# Altium PCB Converter_Module_PT100_V2l1.PcbDoc
Units mm, origin at the board's own origin, x right, y up, seen from the top; angles counter-clockwise.
Board outline 41 x 41 mm, 4 copper layers (L1, L2(GND), L3(PWR), L4), stack 0.778 mm thick; 53 components, 34 nets, 166 pads, 0 vias.
Unrouted connection lines stored in the file: 11.
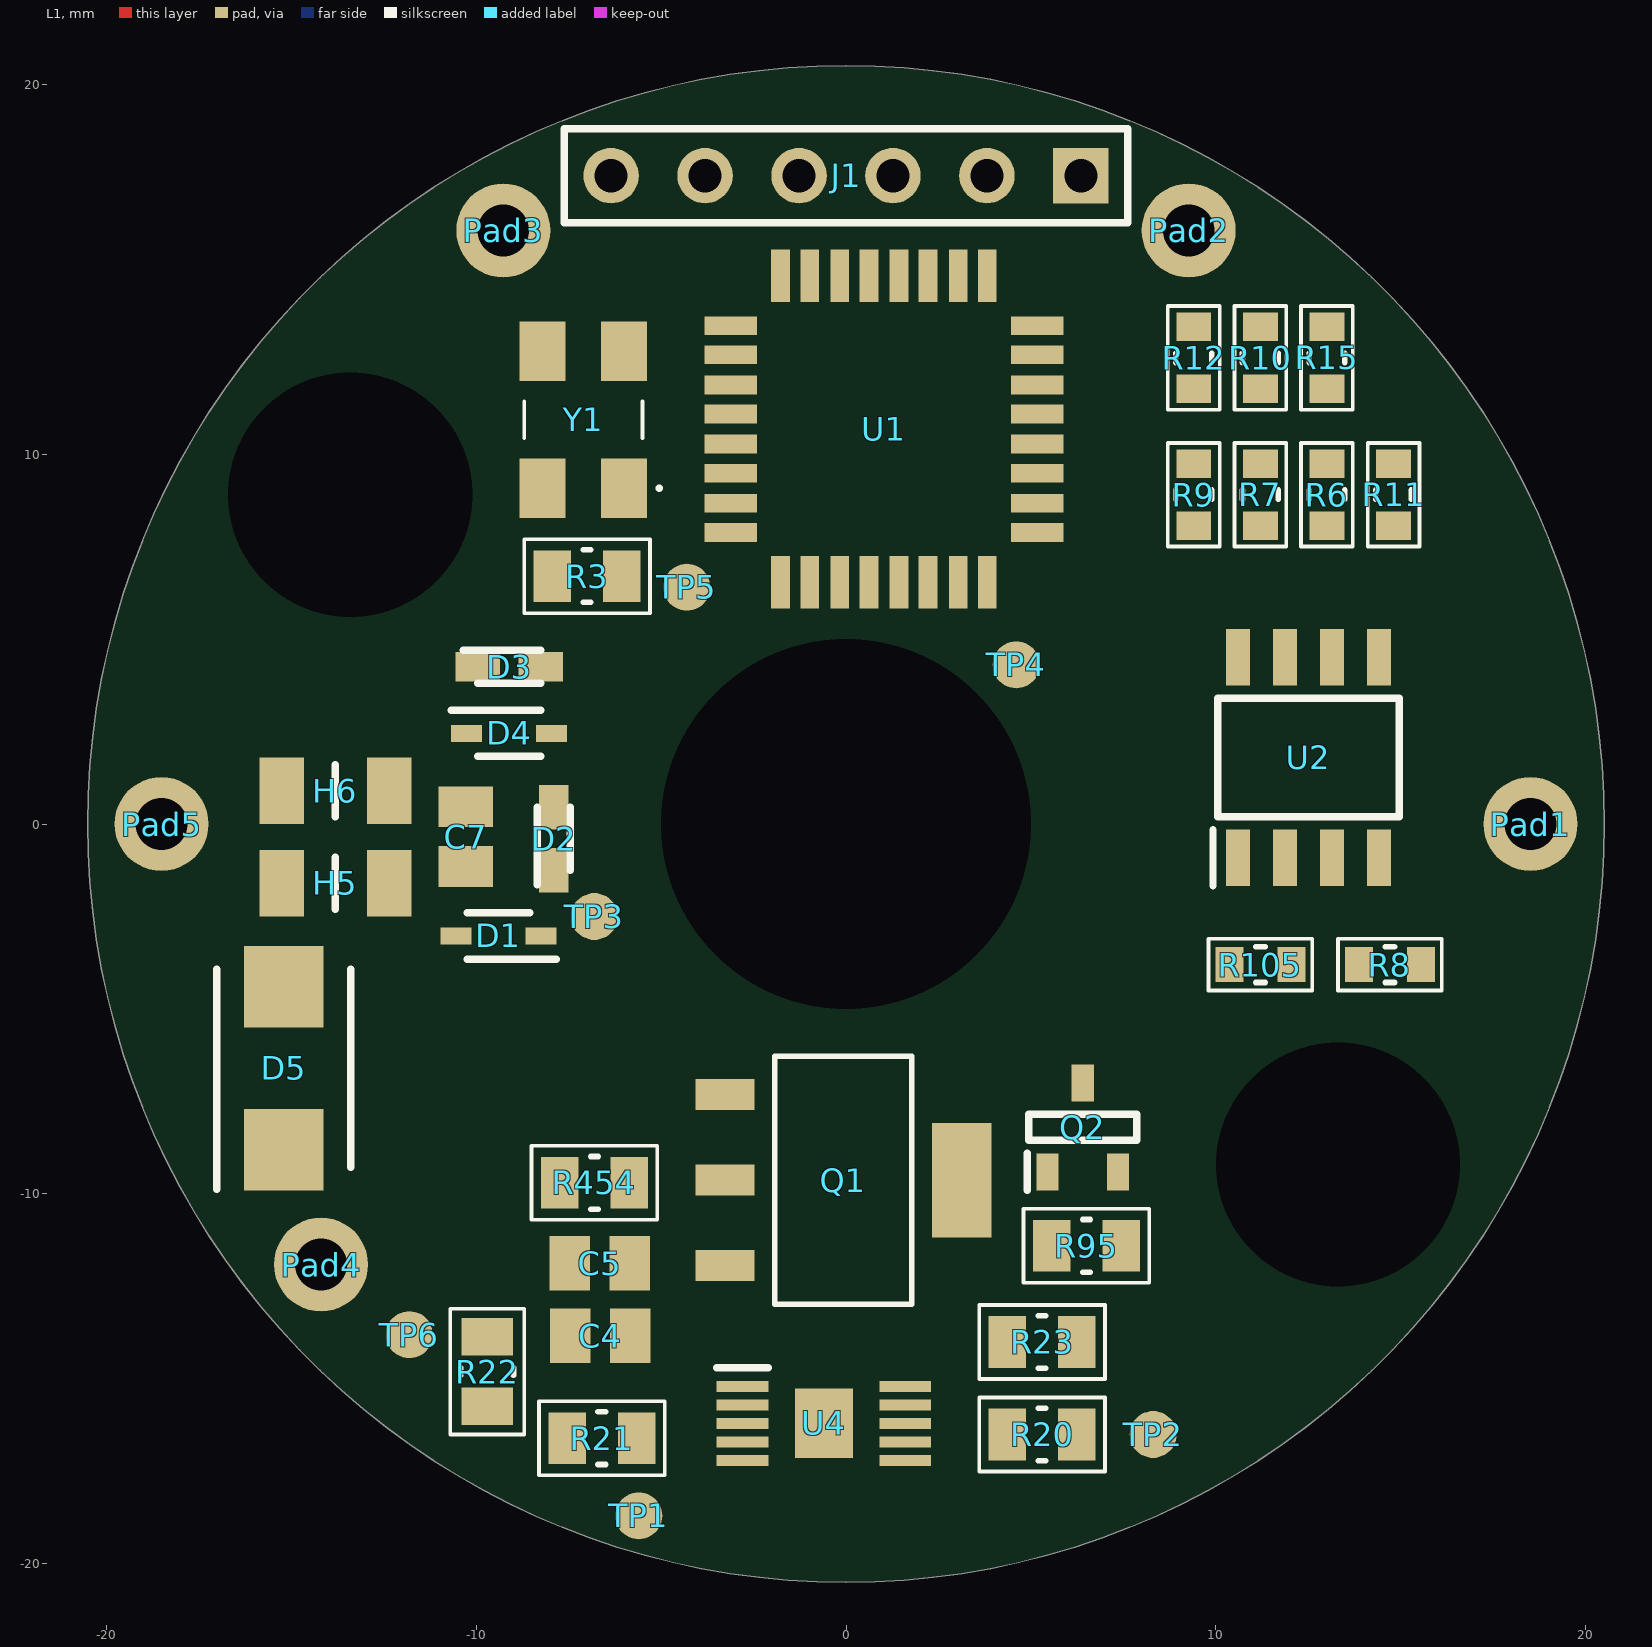
[diagram p0: L1 view]
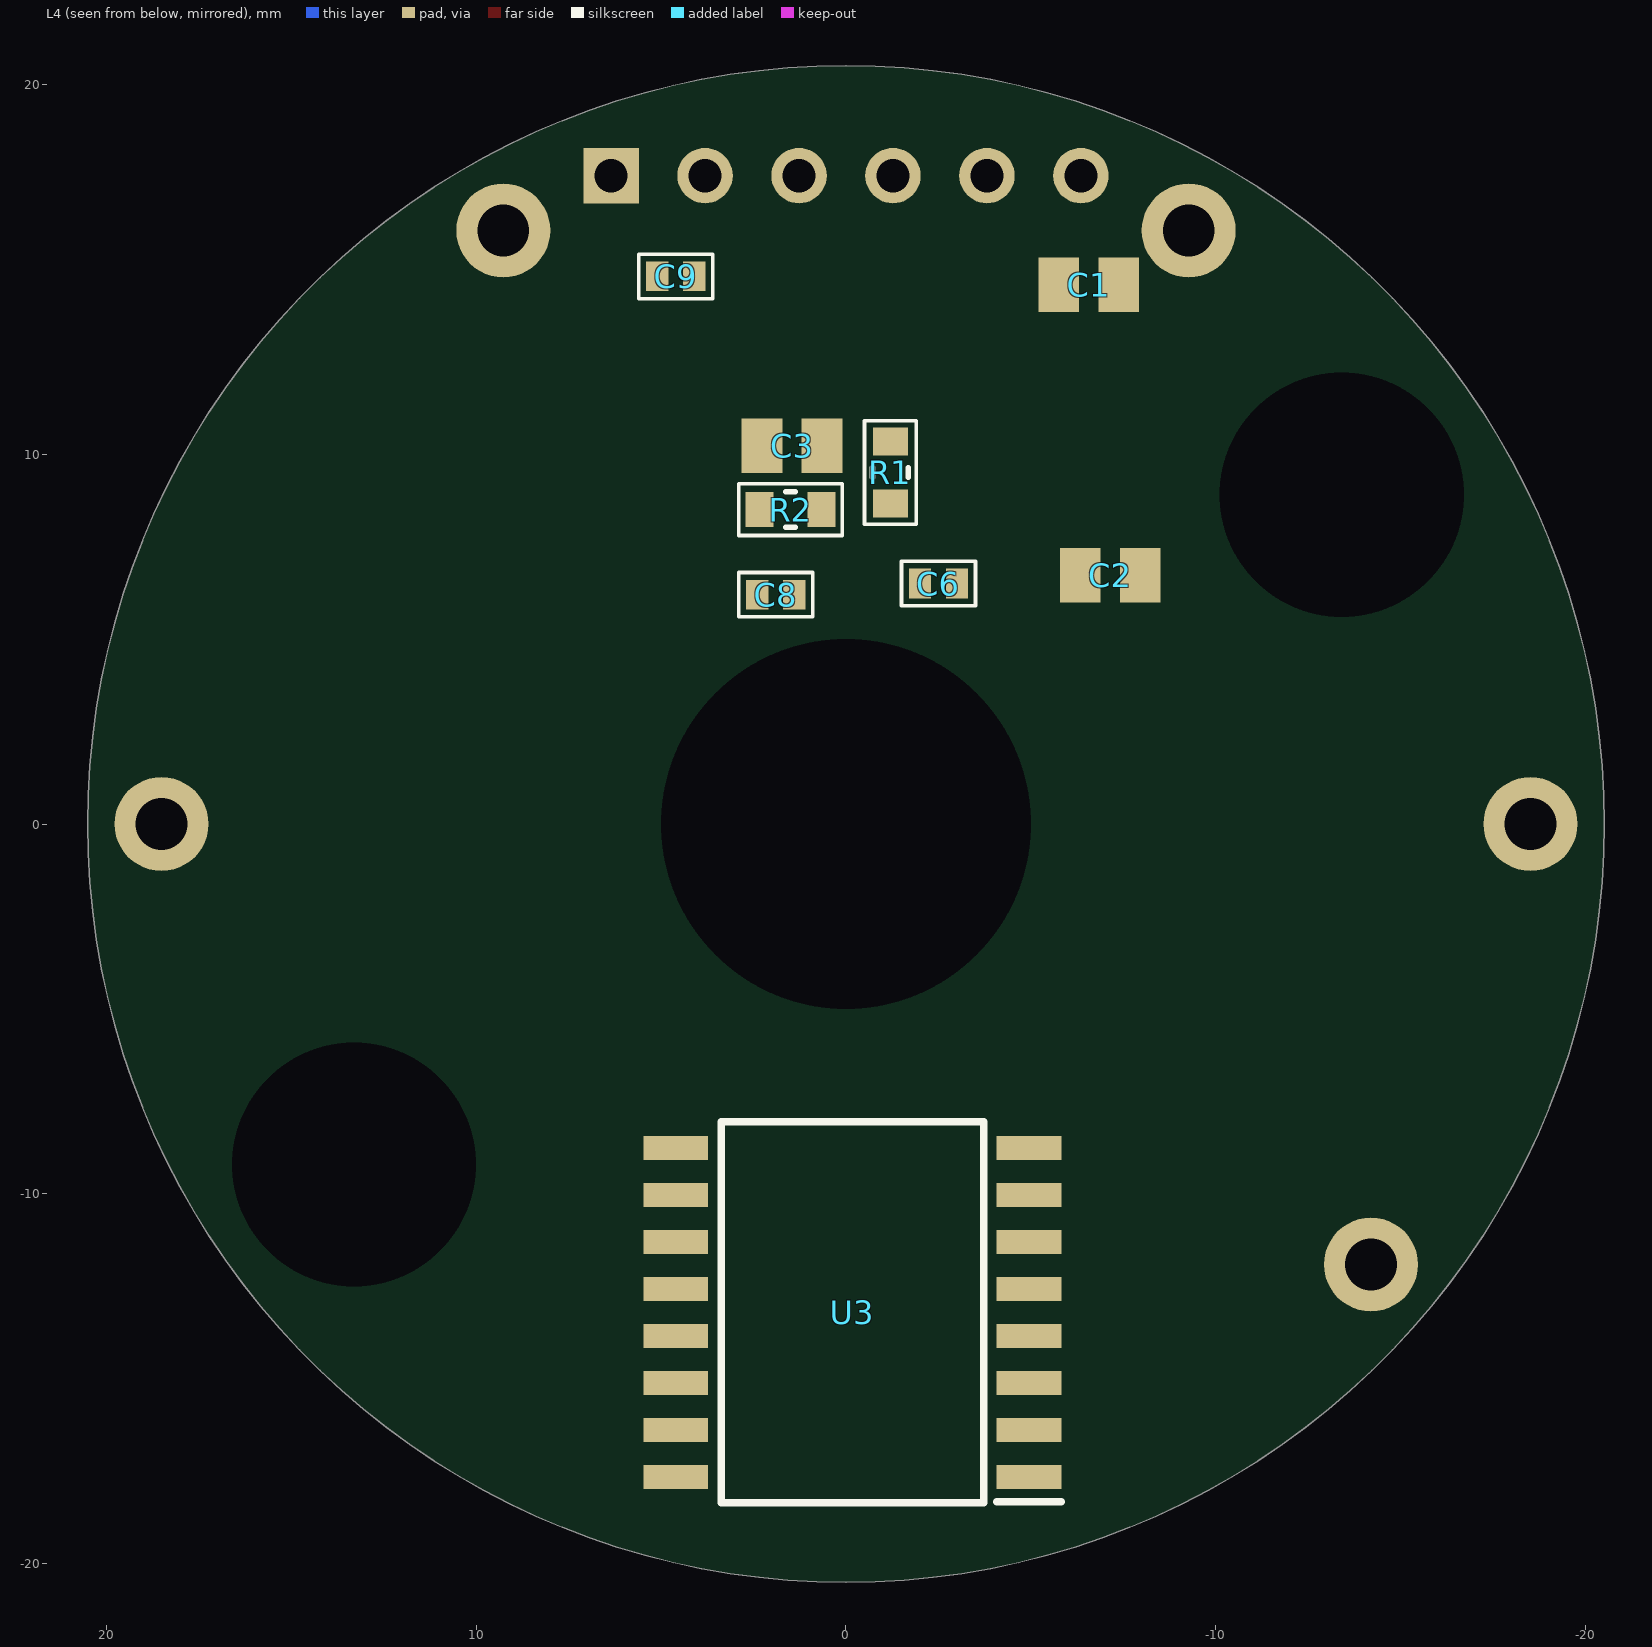
[diagram p1: L4 view, seen from below]
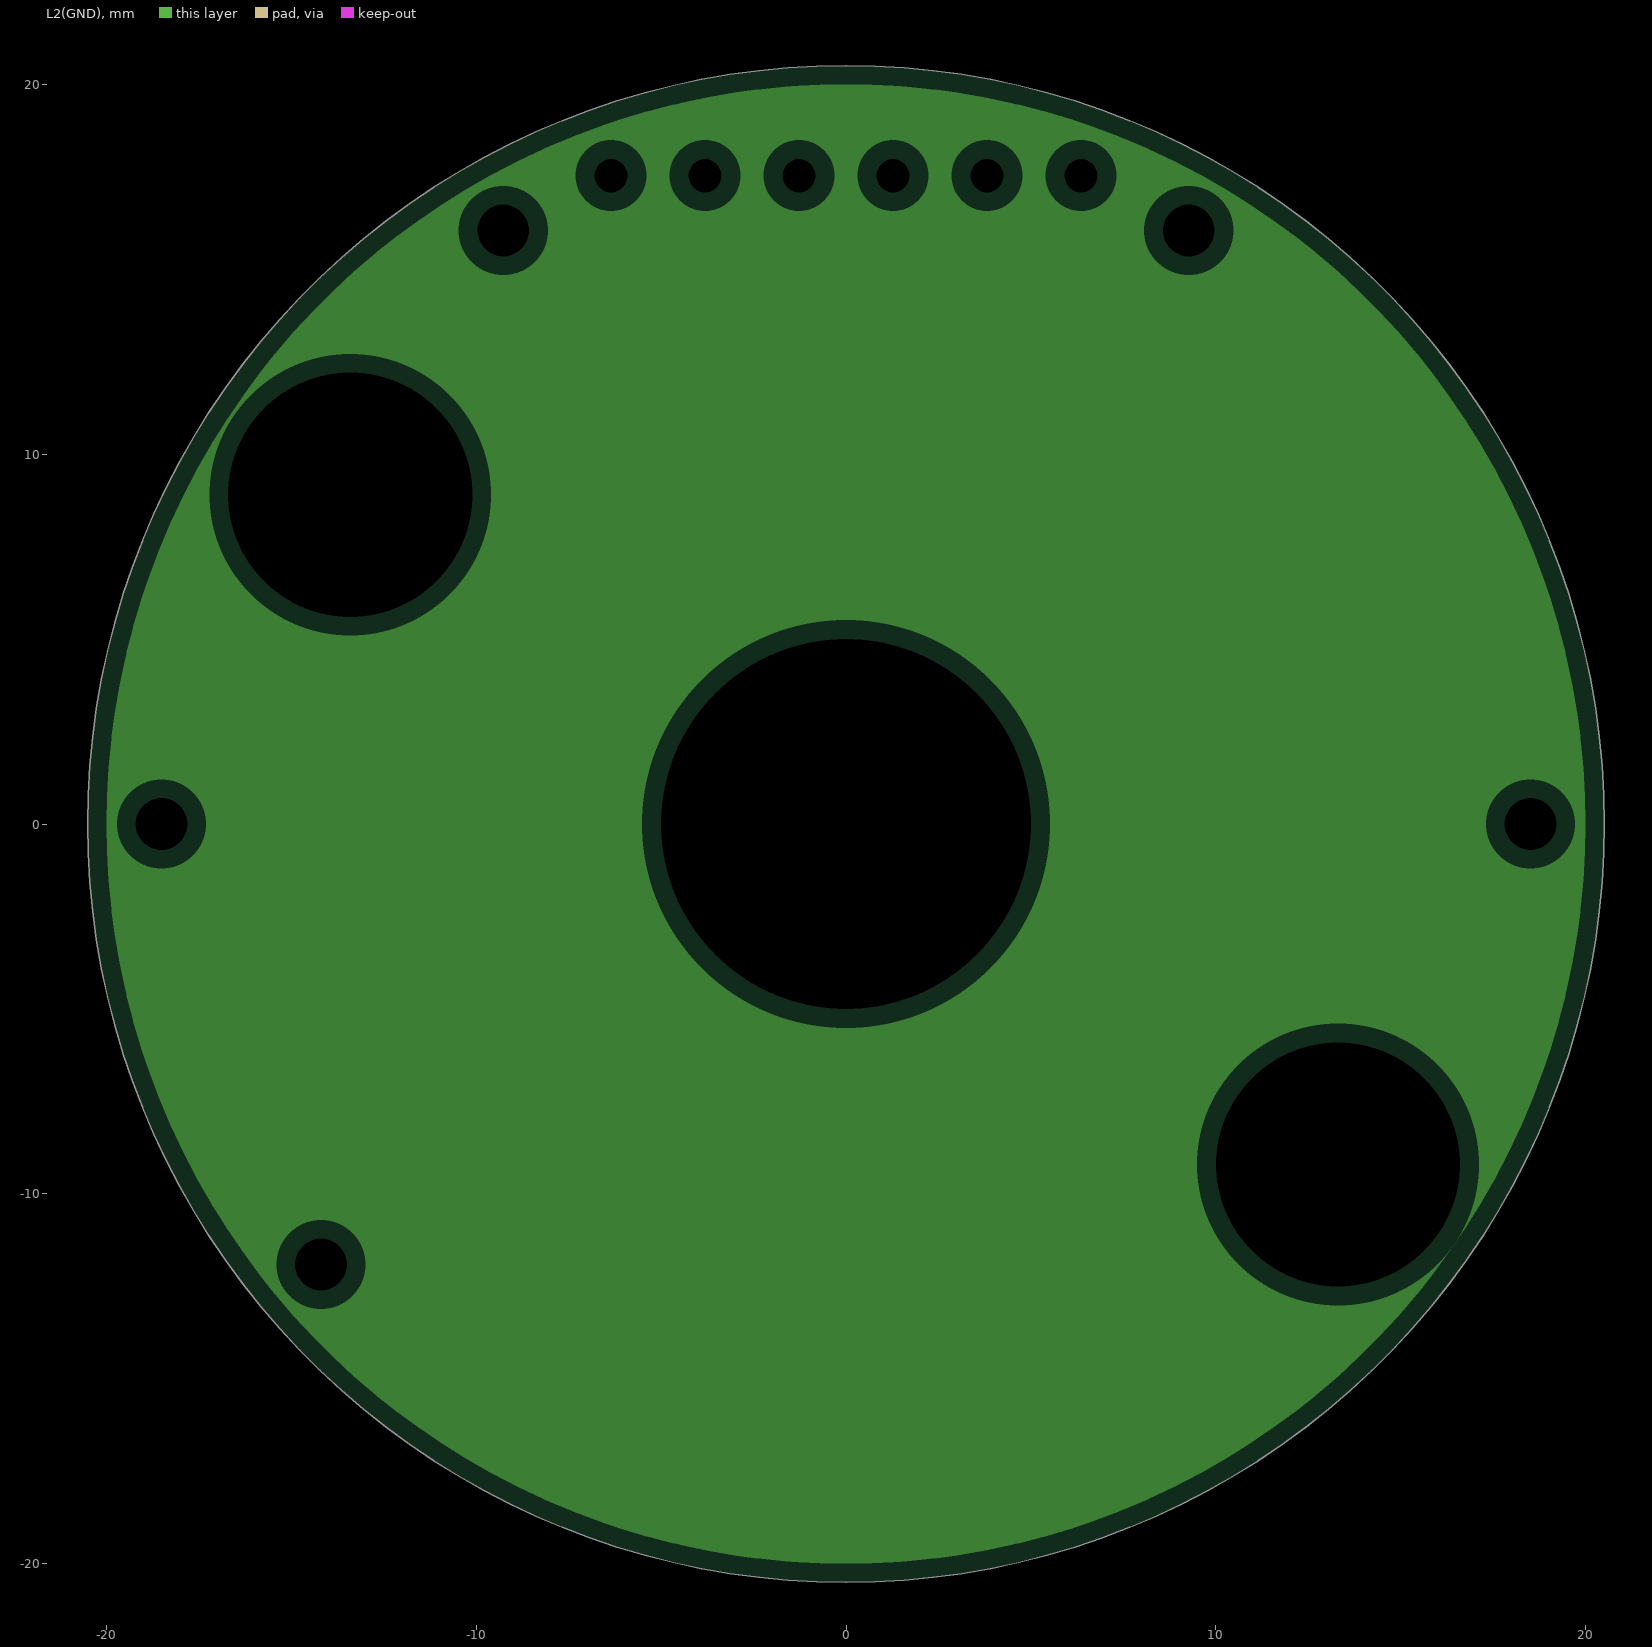
[diagram p2: L2(GND), clearances drawn from the general rule]
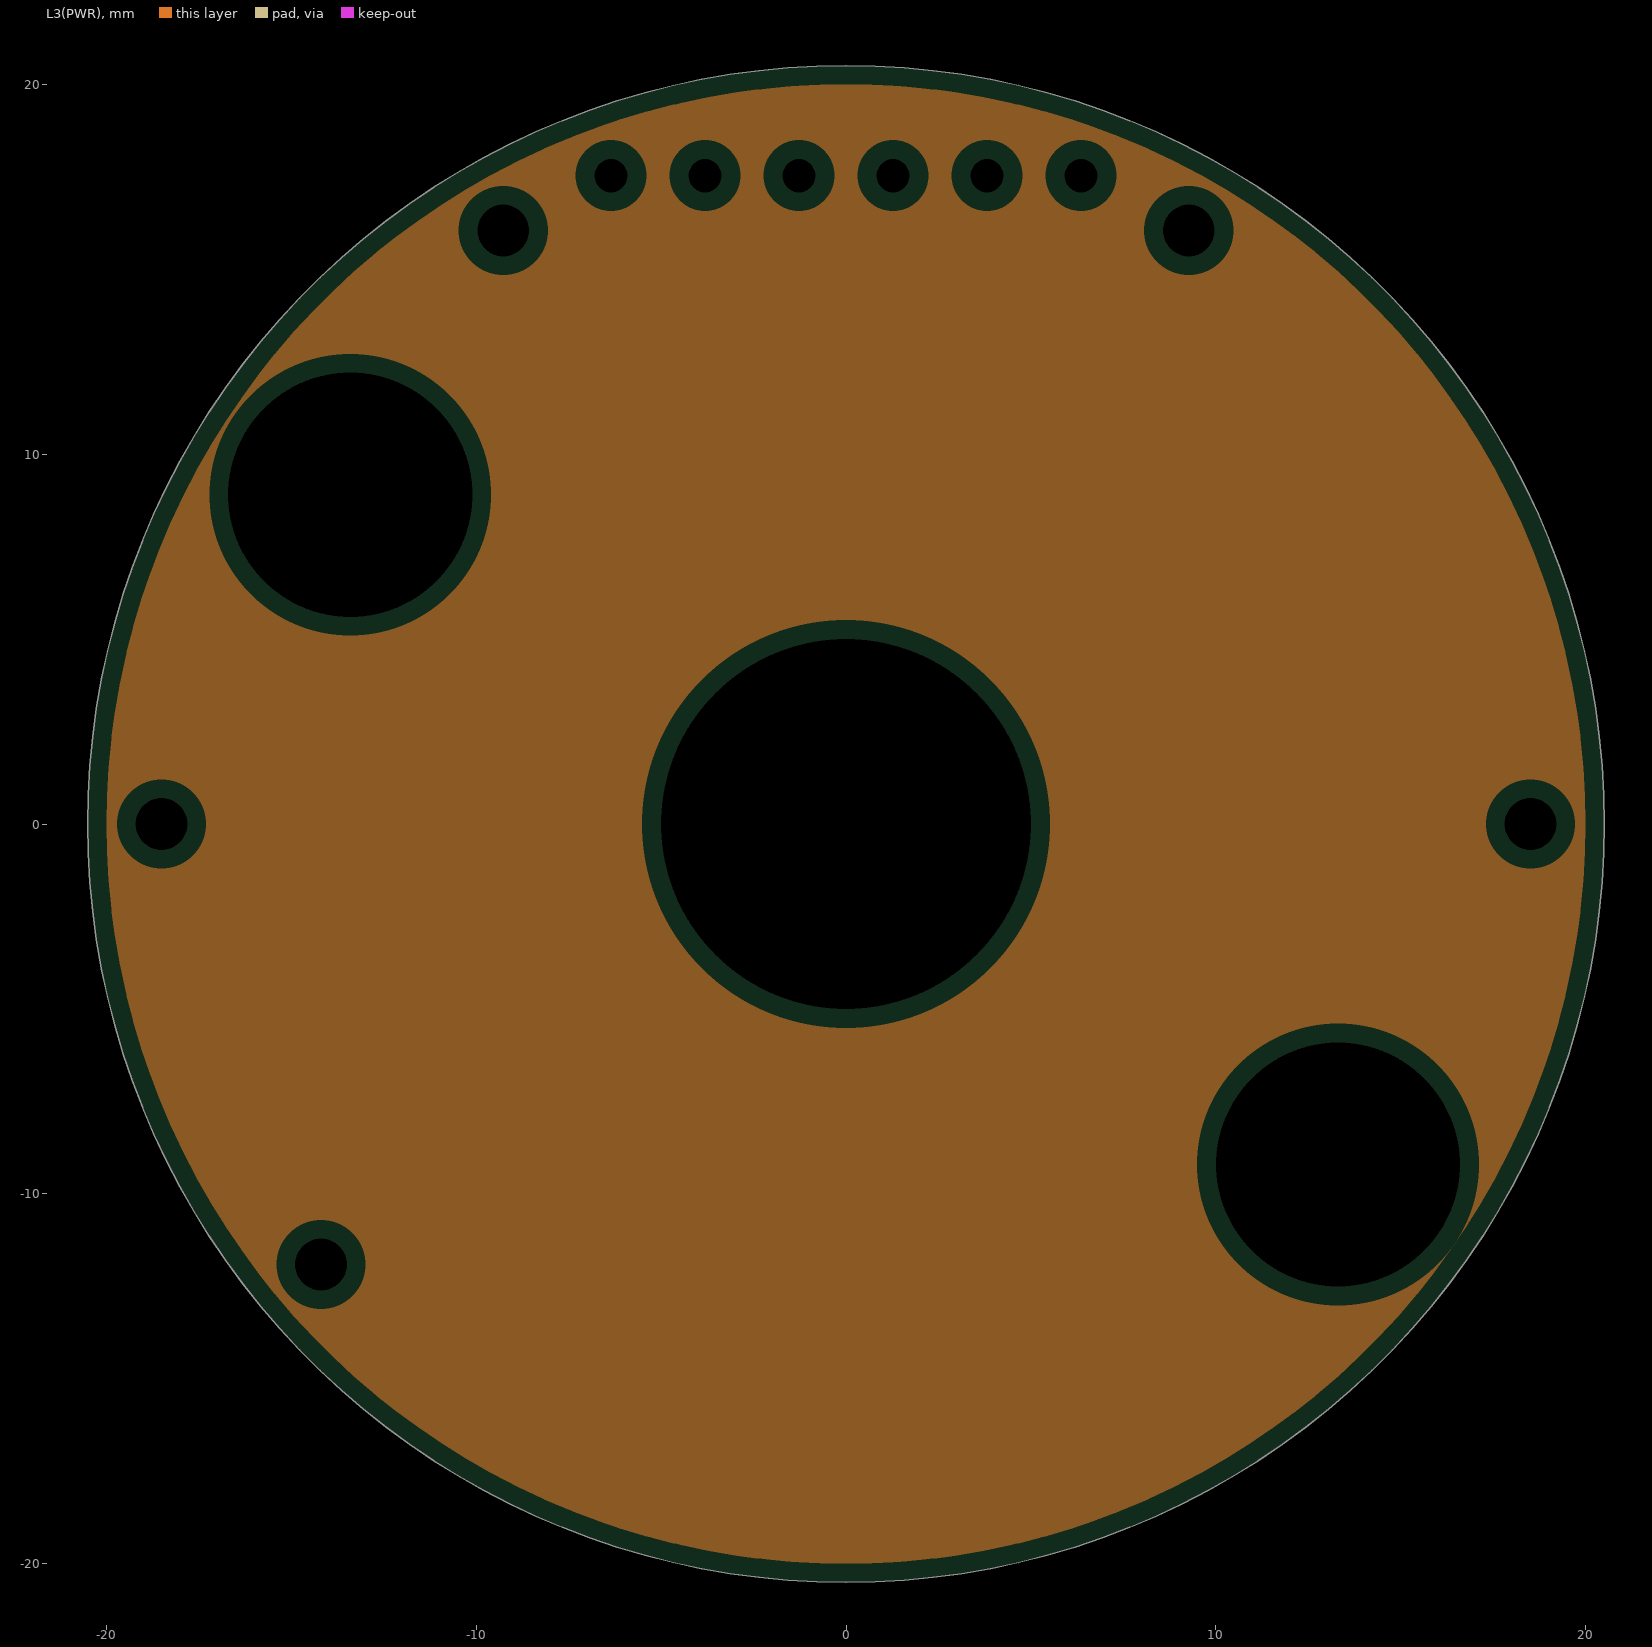
[diagram p3: L3(PWR), clearances drawn from the general rule]

## Layer stack, top to bottom
Top Solder: solder mask 0.0102, Solder Resist, Dk 3.5
L1: signal copper 0.0356
Dielectric 1: core 0.254, FR-4, Dk 4.2
L2(GND): plane copper 0.036
Dielectric 3: prepreg 0.127, Dk 4.2
L3(PWR): plane copper 0.036
Dielectric 2: core 0.254, Dk 4.2
L4: signal copper 0.0356
Bottom Solder: solder mask 0.0102, Solder Resist, Dk 3.5

## Board outline
-20.5,0 ccw(c0,0) 0,-20.5 ccw(c0,0) 20.5,0 ccw(c0,0) 0,20.5 ccw(c0,0)

## Design rules (kind name [scope] priority, off if disabled: settings)
Clearance [All] p1: gap=0.15
PlaneClearance [All] p1: clearance=0.508
PlaneConnect [All] p1: planeconnectstyle=Relief reliefexpansion=0.508 reliefentries=4 reliefconductorwidth=0.254 reliefairgap=0.254
PolygonConnect [All] p1: connectstyle=Relief reliefconductorwidth=0.254 reliefentries=4 polygonreliefangle="90 Angle" airgapwidth=0.254
RoomDefinition "[03] - Converter" [InComponentClass('[03] - Converter')] p1: confinementstyle=ConfineIn formatcopy=TRUE lockcomponents=FALSE outline 78.543,-48.476 339.655,-48.476 339.655,-30.188 78.543,-30.188
RoutingVias [All] p1: holewidth=0.2 width=0.45 viastyle="Through Hole" minholewidth=0.09 minwidth=0.24 maxholewidth=4 maxwidth=4
SolderMaskExpansion [All] p1: expansion=0.102
Width [All] p1: maxlimit=8 minlimit=0.15 preferedwidth=0.15
28 further rules are at their usual default settings.

## Components (designator, comment, footprint, x,y, rotation, side; value= is the part's Value field where it differs from the comment)
C1 "18pF" PCBComponent_1 -6.6,14.5 r0 bottom
C2 "18pF" PCBComponent_1 -7.1,6.8 r180 bottom
C3 "0.01uF" PCBComponent_1 1.5,10.3 r180 bottom
C4 "0.1uF" PCBComponent_1 -6.6,-13.9 r180 top
C5 "0.1uF" PCBComponent_1 -6.7,-11.8 r0 top
C6 "10uF" C0603 -2.5,6.5 r0 bottom
C7 "0.01uF(10nF)" PCBComponent_1 -10.2,-0.3 r270 top
C8 "10uF" C0603 1.9,6.2 r180 bottom
C9 "10uF" C0603 4.6,14.8 r180 bottom
D1 "BAT46WJ,115" BAT46WJ,115 -9.325,-3.05 r180 top
D2 "CDSU101A" CDSU101A -7.9,-0.4 r90 top
D3 "CDSU101A" CDSU101A -9.1,4.25 r0 top
D4 "BAT46WJ,115" BAT46WJ,115 -9.175,2.475 r0 top
D5 "SM6T39CA" SM6T39CA -15.2,-6.6 r90 top
H5 "MI1206K601R" MI1206K601R -13.8,-1.6 r180 top
H6 "MI1206K601R" MI1206K601R -13.8,0.9 r180 top
J1 "Header 6" HDR1X6 6.35,17.525 r180 top
Pad1 "S+" 1X1-BIGPOGO 18.5,0 r90 top
Pad2 "RTD+" 1X1-BIGPOGO 9.262,16.042 r90 top
Pad3 "RTD-" 1X1-BIGPOGO -9.262,16.042 r90 top
Pad4 "Loop-" 1X1-BIGPOGO -14.19,-11.907 r90 top
Pad5 "Loop+" 1X1-BIGPOGO -18.5,0 r90 top
Q1 "BSP613PH6327XTSA1" BSP613PH6327XTA1 -0.2,-9.5 r0 top
Q2 "SMMBT2907ALT3G" MMBT2907ALT3G 6.4,-8.2 r90 top
R1 "10k" R0603 -1.2,9.5 r270 bottom
R2 "10k" R0603 1.5,8.5 r180 bottom
R3 "1M" R0805 -7,6.7 r0 top
R6 "10k" R0603 13,8.9 r270 top
R7 "1k" R0603 11.2,8.9 r90 top
R8 "1k" R0603 14.7,-3.8 r180 top
R9 "10k" R0603 9.4,8.9 r90 top
R10 "100" R0603 11.2,12.6 r270 top
R11 "1k" R0603 14.8,8.9 r270 top
R12 "100" R0603 9.4,12.6 r270 top
R15 "100" R0603 13,12.6 r90 top
R20 "10K" R0805 5.3,-16.5 r0 top
R21 "1.2K" R0805 -6.6,-16.6 r180 top
R22 "12K" R0805 -9.7,-14.8 r270 top
R23 "1.5K" R0805 5.3,-14 r0 top
R95 "15" R0805 6.5,-11.4 r0 top
R105 "10k" R0603 11.2,-3.8 r0 top
R454 "15" R0805 -6.8,-9.7 r0 top
TP1 "Vreg" B1,27 -5.6,-18.7 r90 top
TP2 "DAC" B1,27 8.3,-16.5 r90 top
TP3 "24V" B1,27 -6.8,-2.5 r90 top
TP4 "ADC_In" B1,27 4.6,4.3 r90 top
TP5 "3V3" B1,27 -4.3,6.4 r90 top
TP6 "GND" B1,27 -11.8,-13.8 r90 top
U1 "STM32F303K6T6" QFP80P900X900X160-32N 1.025,10.675 r90 top
U2 "LM358DR" LM358DR 12.5,1.8 r90 top
U3 "TCA0372DWG" TCA0372DWG -0.3,-13.2 r0 bottom
U4 "XTR111AIDGQT" XTR111AIDGQT -0.6,-16.2 r0 top
Y1 "8 MHz" ECS-80-18-30B-AGN-TR -7.1,10.8 r90 top

## Footprints (in the part's own frame and the unit in brackets; to place one, negate y for a bottom-side part, rotate by r counter-clockwise, add the part's x,y. Pads: shape width x height; smd on the part's side, far side on the other; paste and mask are expansions set on the pad)
1X1-BIGPOGO [mm]
  round 2.54 hole 1.4: P$1(0,0)
B1,27 [mm]
  rrect100% 1.27x1.27 smd: TP(0,0)
BAT46WJ,115 [mm] "Schottky Diodes & Rectifiers Schottky Diodes 100V 250mA Single"
  rect 0.84x0.46 smd: 1(-1.08,-0.023) 2(1.22,-0.023)
  silkscreen extent -1.5,-0.65 0.92,0.6
BSP613PH6327XTA1 [mil]
  rect 63x33 smd: 1(-121,86) 2(-121,-5) 3(-121,-96)
  rect 63x122 smd: 4(131,-5)
  silkscreen extent -68,-137 78,127
C0603 [mm]
  rect 0.6x0.8 smd: 1(-0.5,0) 2(0.5,0)
  silkscreen extent -1,-0.6 1,0.6, body extent -0.7,-0.4 0.7,0.4, height 0.8
CDSU101A [mm] "Diodes - General Purpose, Power, Switching 100mA 80V Sm Sgnl Switching"
  rect 1.2x0.8 smd: 1(-0.85,0) 2(0.85,0)
  silkscreen extent -1.25,-0.45 0.85,0.45
ECS-80-18-30B-AGN-TR [mm] "8Mhz Crystal"
  rect 1.6x1.25 smd: 1(-1.723,-1.1) 2(1.977,-1.1) 3(1.977,1.1) 4(-1.723,1.1)
  silkscreen extent -1.77,-2.1 0.63,1.6
HDR1X6 [mm] "Connector; Header; 6 Position"
  rect 1.5x1.5 hole 0.9: 1(0,0)
  round 1.5 hole 0.9: 2(2.54,0) 3(5.08,0) 4(7.62,0) 5(10.16,0) 6(12.7,0)
  silkscreen extent -1.27,-1.27 13.97,1.27
LM358DR [mm]
  rect 1.525x0.65 smd: 1(-2.712,1.905) 2(-2.712,0.635) 3(-2.712,-0.635) 4(-2.712,-1.905) 5(2.712,-1.905) 6(2.712,-0.635) 7(2.712,0.635) 8(2.712,1.905)
  silkscreen extent -3.47,-2.45 1.6,2.58, body extent -2.54,-2.48 2.54,2.35, height 0
MI1206K601R [mm] "Ferrite Beads 600ohms 100MHz 1.5A Monolithic 1206 SMD"
  rect 1.2x1.8 smd: 1(-1.45,0) 2(1.45,0)
  silkscreen extent 0,-0.7 0,0.7
MMBT2907ALT3G [mm]
  rect 1x0.6 smd: 1(-1.2,0.955) 2(-1.2,-0.955) 3(1.2,0)
  silkscreen extent -1.7,-1.46 0.35,1.51
PCBComponent_1 [mm]
  rect 1.1x1.47 smd: 1(-0.769,-0.073) 2(0.851,-0.073)
  body extent -1.2,-0.8 1.2,0.6, height 0.5
QFP80P900X900X160-32N [mil]
  rect 56x20 smd: 1(-163,110) 2(-163,79) 3(-163,47) 4(-163,16) 5(-163,-16) 6(-163,-47) 7(-163,-79) 8(-163,-110) 17(163,-110) 18(163,-79) 19(163,-47) 20(163,-16) 21(163,16) 22(163,47) 23(163,79) 24(163,110)
  rect 20x56 smd: 9(-110,-163) 10(-79,-163) 11(-47,-163) 12(-16,-163) 13(16,-163) 14(47,-163) 15(79,-163) 16(110,-163) 25(110,163) 26(79,163) 27(47,163) 28(16,163) 29(-16,163) 30(-47,163) 31(-79,163) 32(-110,163)
R0603 [mil]
  rect 30x37 smd: 1(-33,0) 2(33,0)
  silkscreen extent -55,-28 55,28
R0805 [mil]
  rect 40x55 smd: 1(-37,0) 2(37,0)
  silkscreen extent -67,-39 67,39
SM6T39CA [mm] "ESD Suppressors / TVS Diodes 600W 39V Bidirect"
  rect 2.2x2.15 smd: 1(-2.2,0) 2(2.2,0)
  silkscreen extent -3.27,-1.81 2.68,1.81
TCA0372DWG [mm]
  rect 1.75x0.65 smd: 1(-4.648,4.445) 2(-4.648,3.175) 3(-4.648,1.905) 4(-4.648,0.635) 5(-4.648,-0.635) 6(-4.648,-1.905) 7(-4.648,-3.175) 8(-4.648,-4.445) 9(4.902,-4.445) 10(4.902,-3.175) 11(4.902,-1.905) 12(4.902,-0.635) 13(4.902,0.635) 14(4.902,1.905) 15(4.902,3.175) 16(4.902,4.445)
  silkscreen extent -5.52,-5.15 3.68,5.15
XTR111AIDGQT [mm]
  rect 1.4x0.3 smd: 1(-2.2,1) 2(-2.2,0.5) 3(-2.2,0) 4(-2.2,-0.5) 5(-2.2,-1) 6(2.2,-1) 7(2.2,-0.5) 8(2.2,0) 9(2.2,0.5) 10(2.2,1)
  rect 1.57x1.88 smd: 11(0,0)
  silkscreen extent -2.9,1.5 -1.5,1.5

## Part data
C1 C2: library part VJ0805A180KXQPW1BC, "Multilayer Ceramic Capacitors MLCC - SMD/SMT 0805 18pF 10volts C0G 10%"
C3: library part AS0805KRX7R9BB103, "Multilayer Ceramic Capacitors MLCC - SMD/SMT 0.01uF 10% 50V AEC-Q200"
C4 C5: library part AS0805KKX7R9BB104, "Multilayer Ceramic Capacitors MLCC - SMD/SMT 0.1uF 10% 50V AEC-Q200"
C6 C8 C9: library part C0603C106M8PACTU, "Multilayer Ceramic Capacitors MLCC - SMD/SMT 10V 10uF 0603 X5R 20%"
C7: library part C0805X103K1GECAUTO, "Multilayer Ceramic Capacitors MLCC - SMD/SMT 100V 0.01uF C0G 0805 10% AEC-Q200"
D1 D4: "Schottky Diodes & Rectifiers Schottky Diodes 100V 250mA Single"
D2 D3: "Diodes - General Purpose, Power, Switching 100mA 80V Sm Sgnl Switching"
D5: "ESD Suppressors / TVS Diodes 600W 39V Bidirect"
H5 H6: library part MI1206K601R-10, "Ferrite Beads 600ohms 100MHz 1.5A Monolithic 1206 SMD"
J1: "Header, 6-Pin"
Pad1 Pad2 Pad3 Pad4 Pad5: library part PINHD-1X1-BIGPOGO
Q1: "MOSFET P-Ch -60V -2.9A SOT-223-3"
Q2: "Bipolar Transistors - BJT SS GP XSTR SPCL TR"
R1 R2 R6 R9 R105: library part RT0603FRE0710KL, "Thin Film Resistors - SMD 10K ohm 1% 1/10W"
R3: library part AT0805DRD071ML, "Thin Film Resistors - SMD 1 Mohm 0.5% Tol. AEC-Q200"
R7 R8 R11: library part RT0603FRE071KL, "Thin Film Resistors - SMD 1K ohm 1% 1/10W"
R10 R12 R15: library part RT0603FRE07100RL, "Thin Film Resistors - SMD 1/10W 100 ohm 1% 50ppm"
R20: library part RC0805FR-7W10KL, "Thick Film Resistors - SMD 10K   OHM   1% 1/4W"
R21: library part RCS08051K20FKEA, "Thick Film Resistors - SMD 0.4watt 1.2Kohms 1% 100ppm"
R22: library part RC0805FR-0712KL, "Thick Film Resistors - SMD 12K OHM 1%"
R23: library part RT0805FRE101K5L, "Thin Film Resistors - SMD 1.5K ohm 1% 50 ppm Thin Film"
R95 R454: library part AT0805BRD0715RL, "Thin Film Resistors - SMD 15 Ohms 0.1% Tol. AEC-Q200"
TP1 TP2 TP3 TP4 TP5 TP6: library part TPTP12R
U1: "ARM Microcontrollers - MCU 16/32-BITS MICROS"
U2: "Operational Amplifiers - Op Amps Dual Op Amp"
U3: "Operational Amplifiers - Op Amps 5-40V 1A Output Extended Temp"
U4: "Sensor Interface Prec Vltg-to-Crnt Conv/Transmitter"
Y1: library part ECS-80-18-30B-AGN-TR, "Crystals 8MHz 25ppm 18pF -40C +85C"

## Free pads (board coordinates)
  round 1.524 hole 10: 5(0,0)
  round 1.524 hole 6.6: 6(-13.4,8.9) 7(13.3,-9.2)

## Nets (pads, with @x,y where several pads share a name; then routed paths per layer and width w, separated by ;. In a path a pad name is that pad's centre, name@x,y a point inside that pad or via, vN(x,y) a via of type N, cw(c..) or ccw(c..) an arc to the next point about the centre after c; other vN are vias at no path point)
3V3: C6.2 C8.2 C9.2 J1.1 R2.1 R10.2 R12.2 TP5.TP U1.1 U1.5 U1.17 U3.2 U3.7
24V: C4.1 D1.1 D2.1 TP3.TP U2.8 U3.1 U4.1
+INPUTB: R21.1 TP1.TP U3.8 U4.5
ADC_IN: R7.1 R9.1 TP4.TP U1.6 U2.6
DAC_OUT: R20.2 TP2.TP U1.10
GND: C1.1 C2.1 C3.1 C4.2 C5.1 C6.1 C8.1 C9.1 J1.2 Pad3.P$1 R1.1 R6.1 R7.2 R15.1 R22.1 R23.2 TP6.TP U1.32 U2.4 U3.4 U3.5 U3.12 U3.13 U4.9 U4.10 U4.11
IOUT: D3.2 D4.2 R454.1
NetC1_2: C1.2 Y1.2
NetC2_2: C2.2 Y1.4
NetC5_2: C5.2 Q1.3 R454.2
NetC7_1: C7.1 D2.2 D4.1 H6.1
NetC7_2: C7.2 D1.2 D3.1 H5.1
NetD5_1: D5.1 H6.2 Pad4.P$1
NetD5_2: D5.2 H5.2 Pad5.P$1
NetPad1_P$1: Pad1.P$1 R8.1
NetPad2_P$1: Pad2.P$1 R12.1
NetQ1_1: Q1.1 Q2.3 U4.3
NetQ1_4: Q1.4 Q2.1 R95.1
NetQ2_2: Q2.2 R95.2 U4.2
NetR1_2: R1.2 U1.31
NetR3_1: R3.1 U1.3 Y1.1
NetR3_2: R3.2 U1.2 Y1.3
NetR6_2: R6.2 R11.2 U2.3
NetR8_2: R8.2 R105.2 U2.2
NetR9_2: R9.2 U2.7
NetR10_1: R10.1 R11.1 R15.2
NetR20_1: R20.1 U4.6
NetR21_2: R21.2 R22.2 U4.4
NetR23_1: R23.1 U4.7
NetR105_1: R105.1 U2.1 U2.5
NRST: C3.2 J1.3 R2.2 U1.4
SWCLK: J1.5 U1.24
SWDIO: J1.4 U1.23
SWO: J1.6 U1.26
pads on no net: Q1.2 U1.7 U1.8 U1.9 U1.11 U1.12 U1.13 U1.14 U1.15 U1.16 U1.18 U1.19 U1.20 U1.21 U1.22 U1.25 U1.27 U1.28 U1.29 U1.30 U3.3 U3.6 U3.9 U3.10 U3.11 U3.14 U3.15 U3.16 U4.8

## Polygon pours and split planes (outlines as drawn)
no net on L2(GND) (split plane): 209 vertices, not listed, extent -19.992,-19.992 19.992,19.992
no net on L3(PWR) (split plane): 209 vertices, not listed, extent -19.992,-19.992 19.992,19.992

## Text inside footprints (layer, text, board x,y; h text height)
TP1: Mechanical 25 ">TP_SIGNAL_NAME" at -3.695,-19.335 h1.55 r90
TP2: Mechanical 25 ">TP_SIGNAL_NAME" at 10.205,-17.135 h1.55 r90
TP3: Mechanical 25 ">TP_SIGNAL_NAME" at -4.895,-3.135 h1.55 r90
TP4: Mechanical 25 ">TP_SIGNAL_NAME" at 6.505,3.665 h1.55 r90
TP5: Mechanical 25 ">TP_SIGNAL_NAME" at -2.395,5.765 h1.55 r90
TP6: Mechanical 25 ">TP_SIGNAL_NAME" at -9.895,-14.435 h1.55 r90